# Altium PCB PCB_GEVE.PcbDoc
Units mm, origin at the board's own origin, x right, y up, seen from the top; angles counter-clockwise.
Board outline 138 x 140 mm, 4 copper layers (Component Side, GND, Alimentation, Solder Side), stack 0.844 mm thick; 88 components, 62 nets, 258 pads, 25 vias.
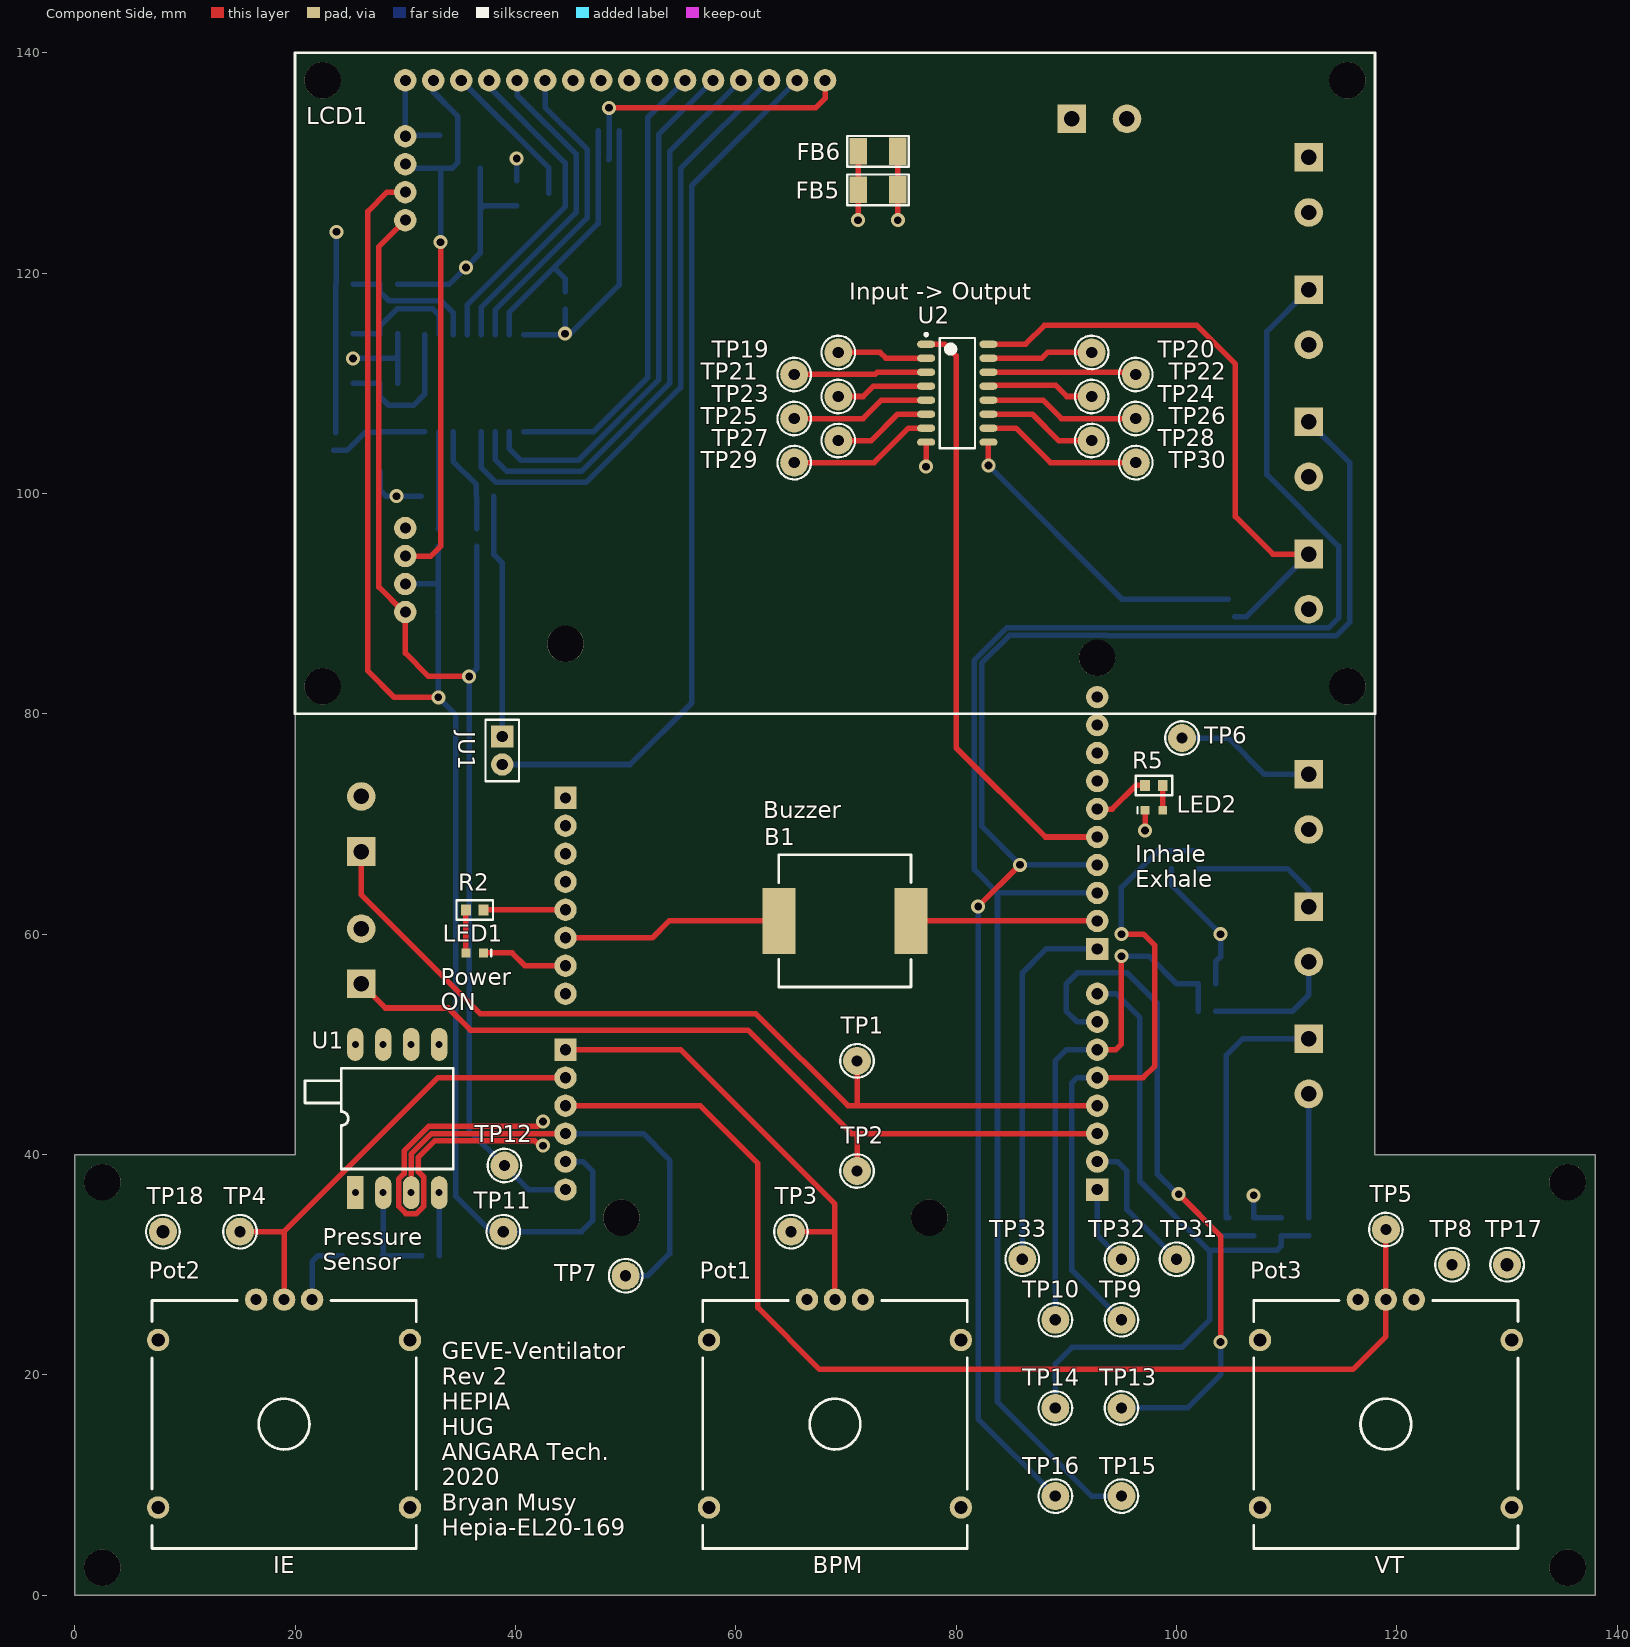
[diagram p0: Component Side view]
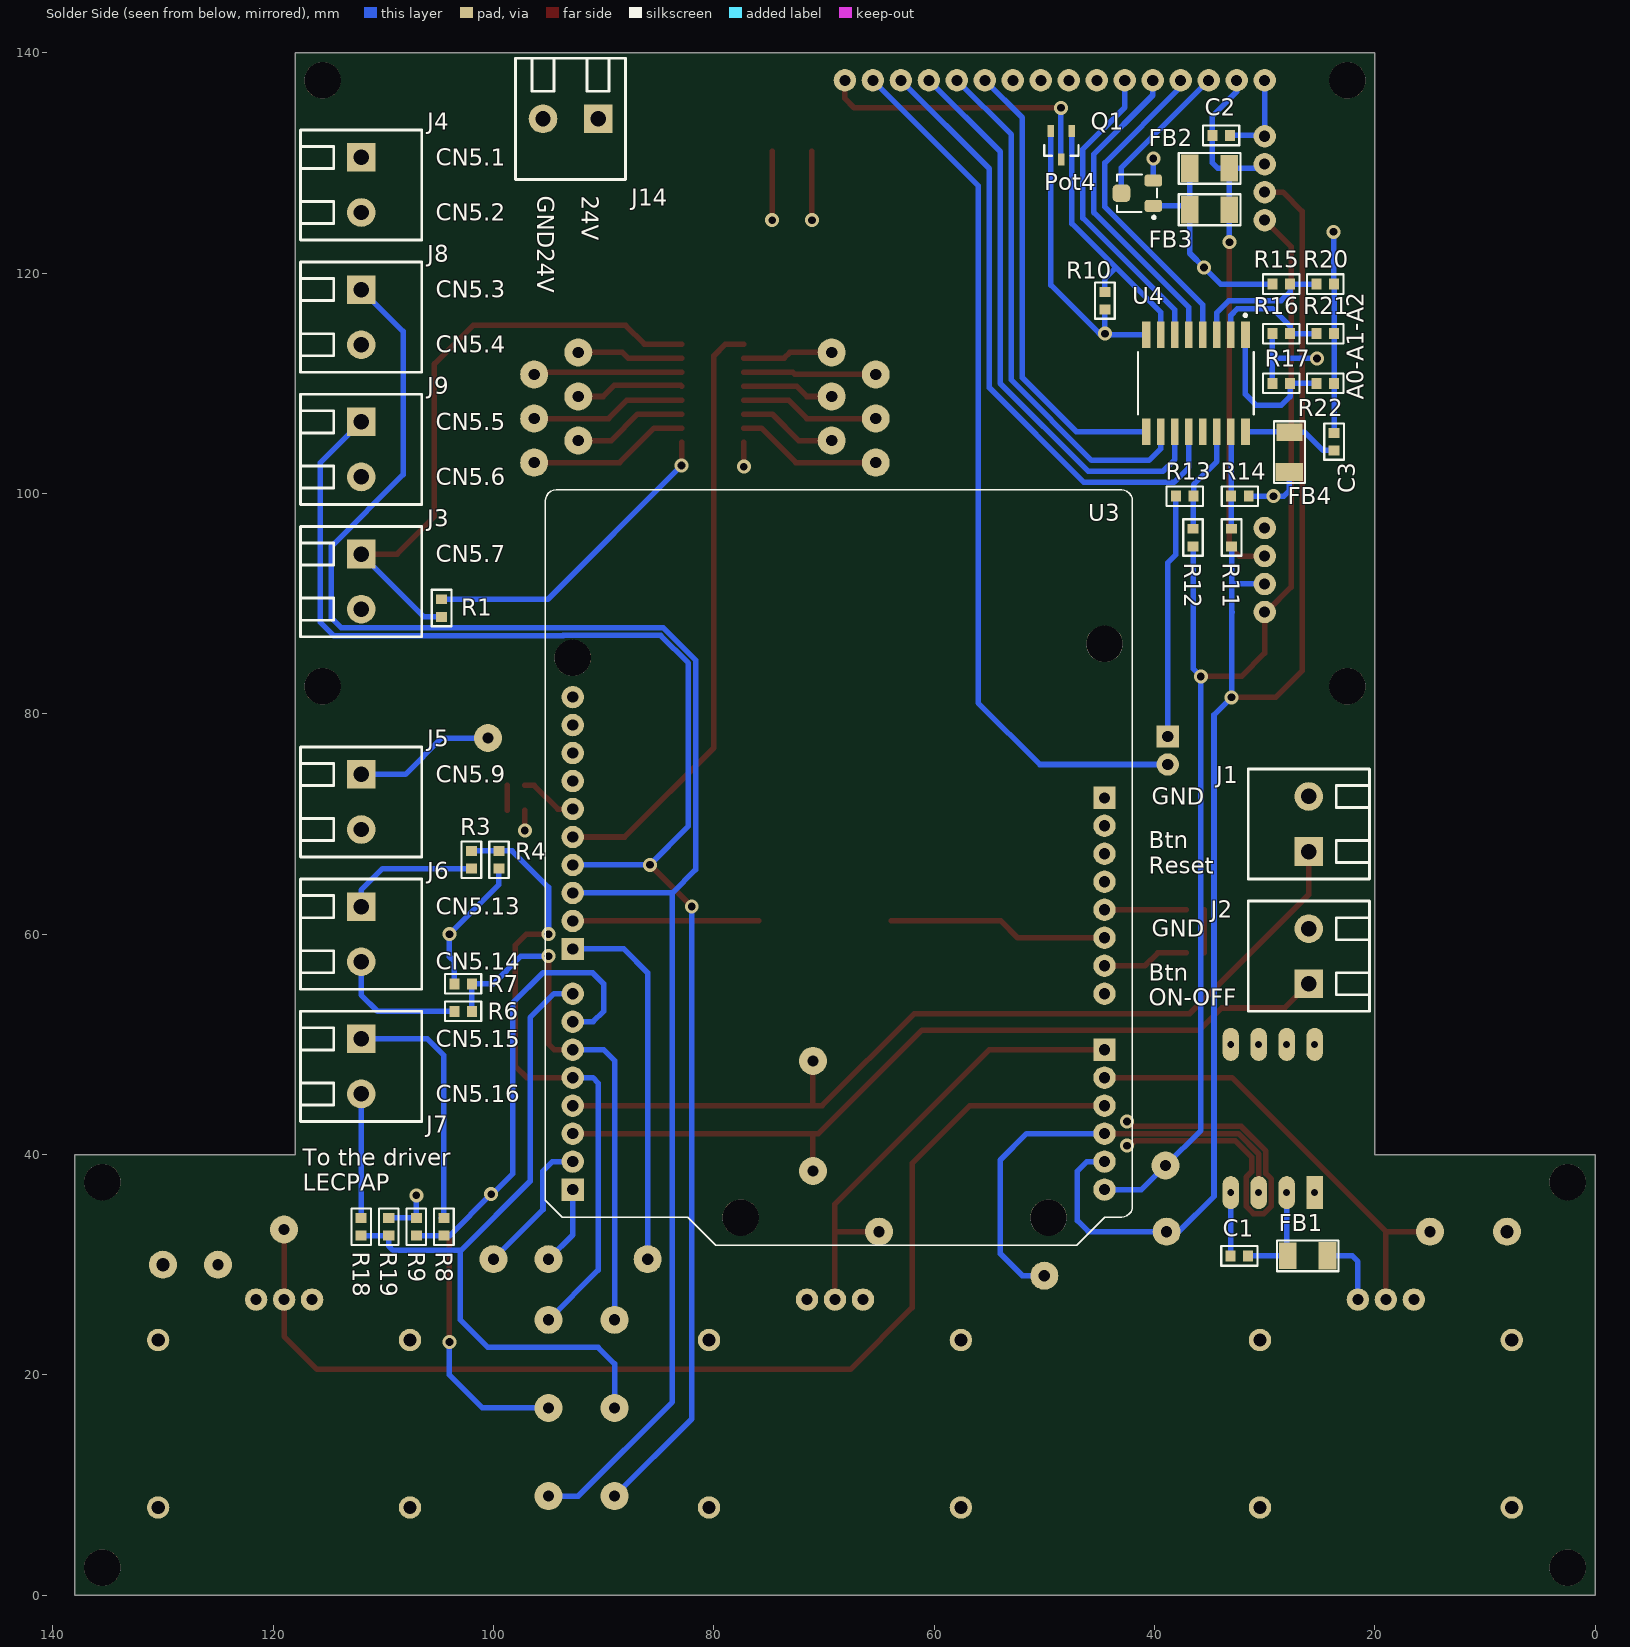
[diagram p1: Solder Side view, seen from below]
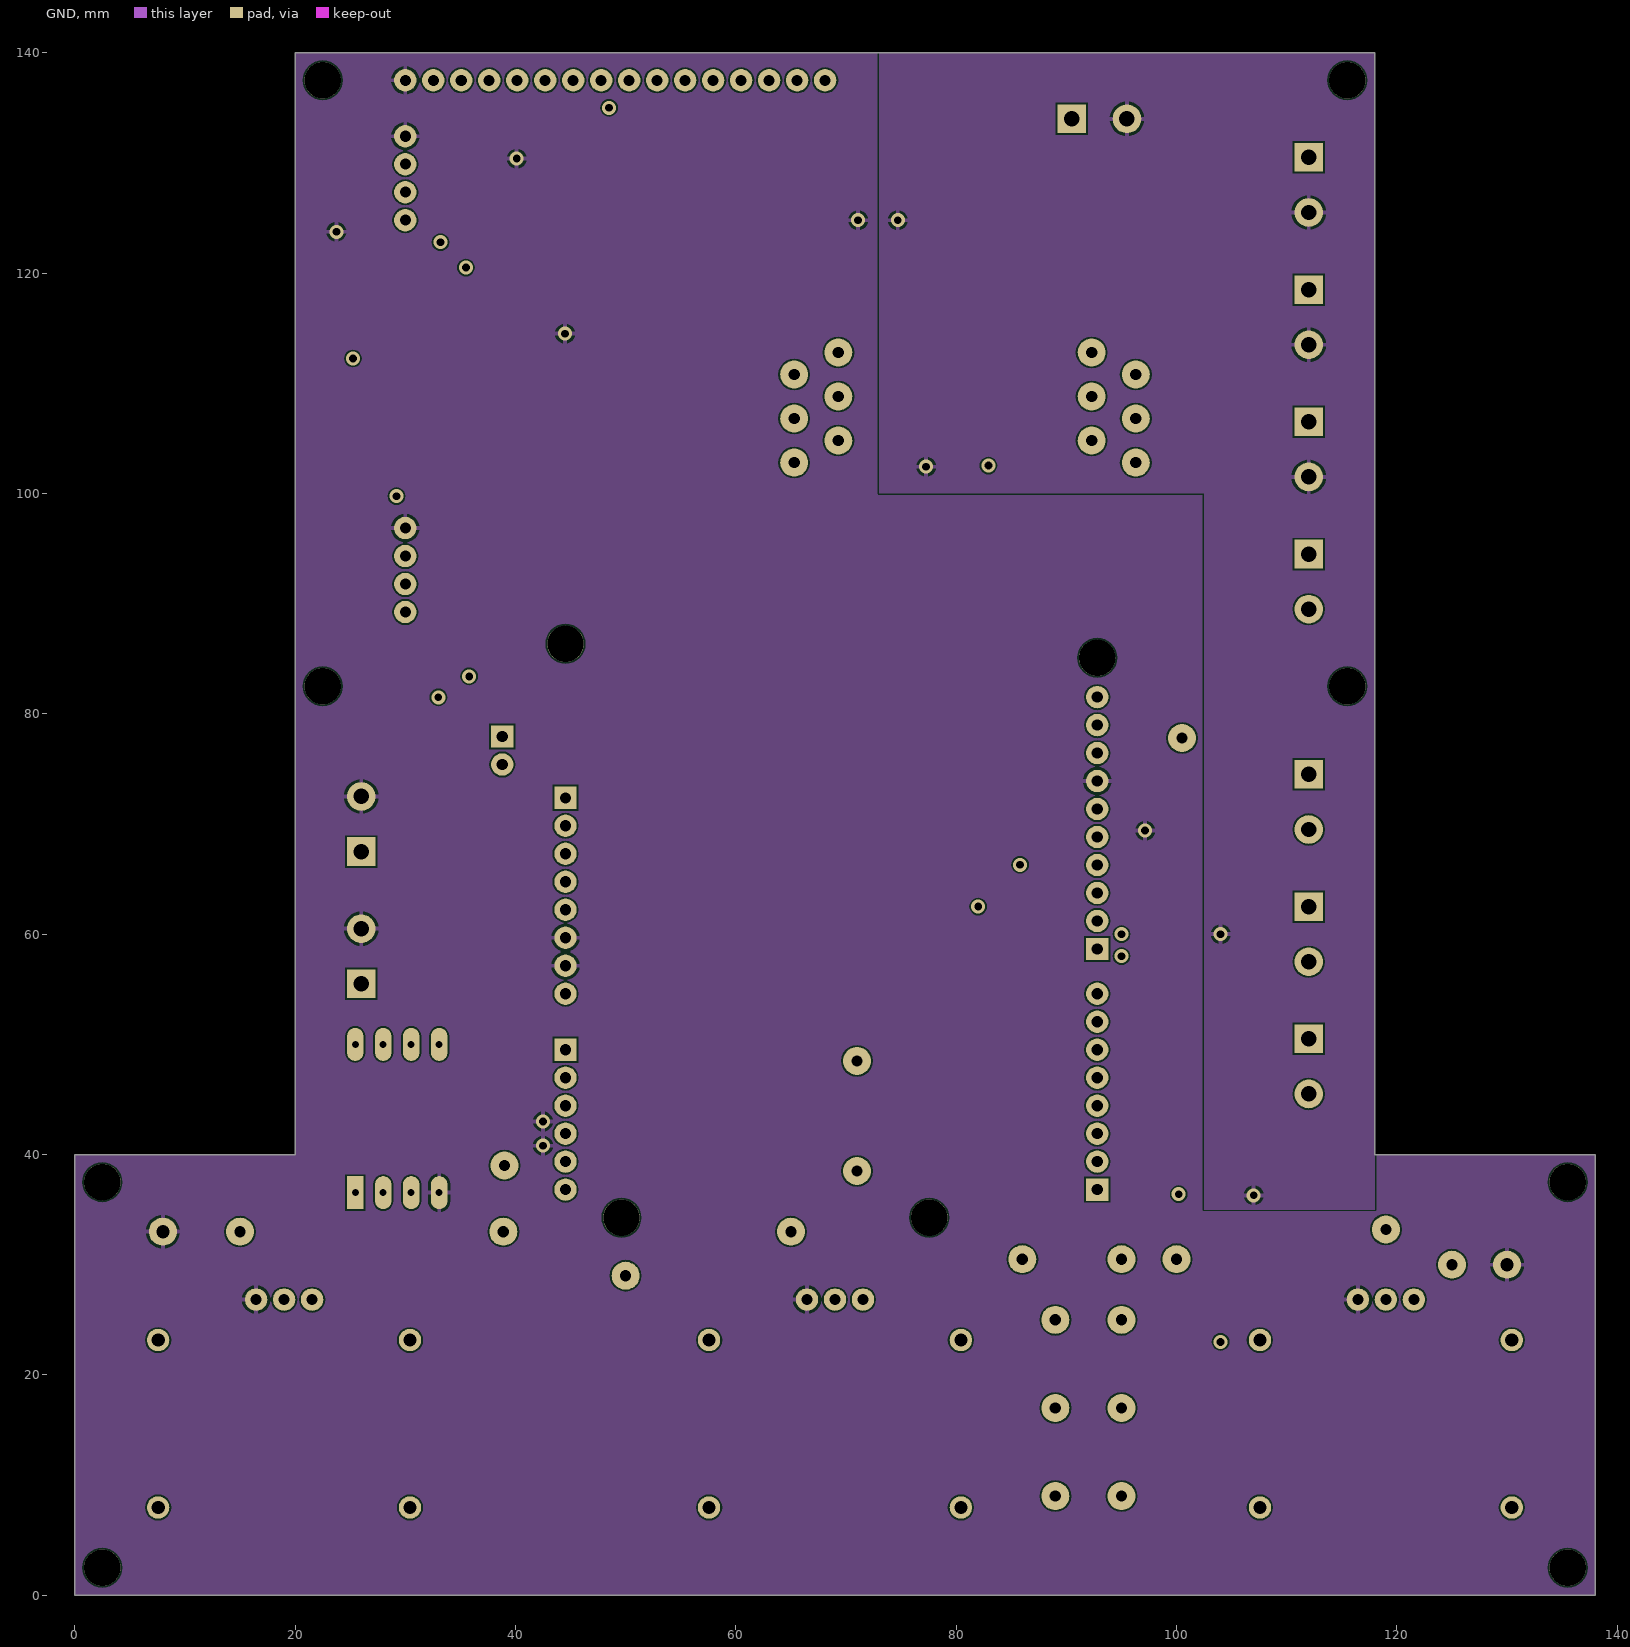
[diagram p2: GND]
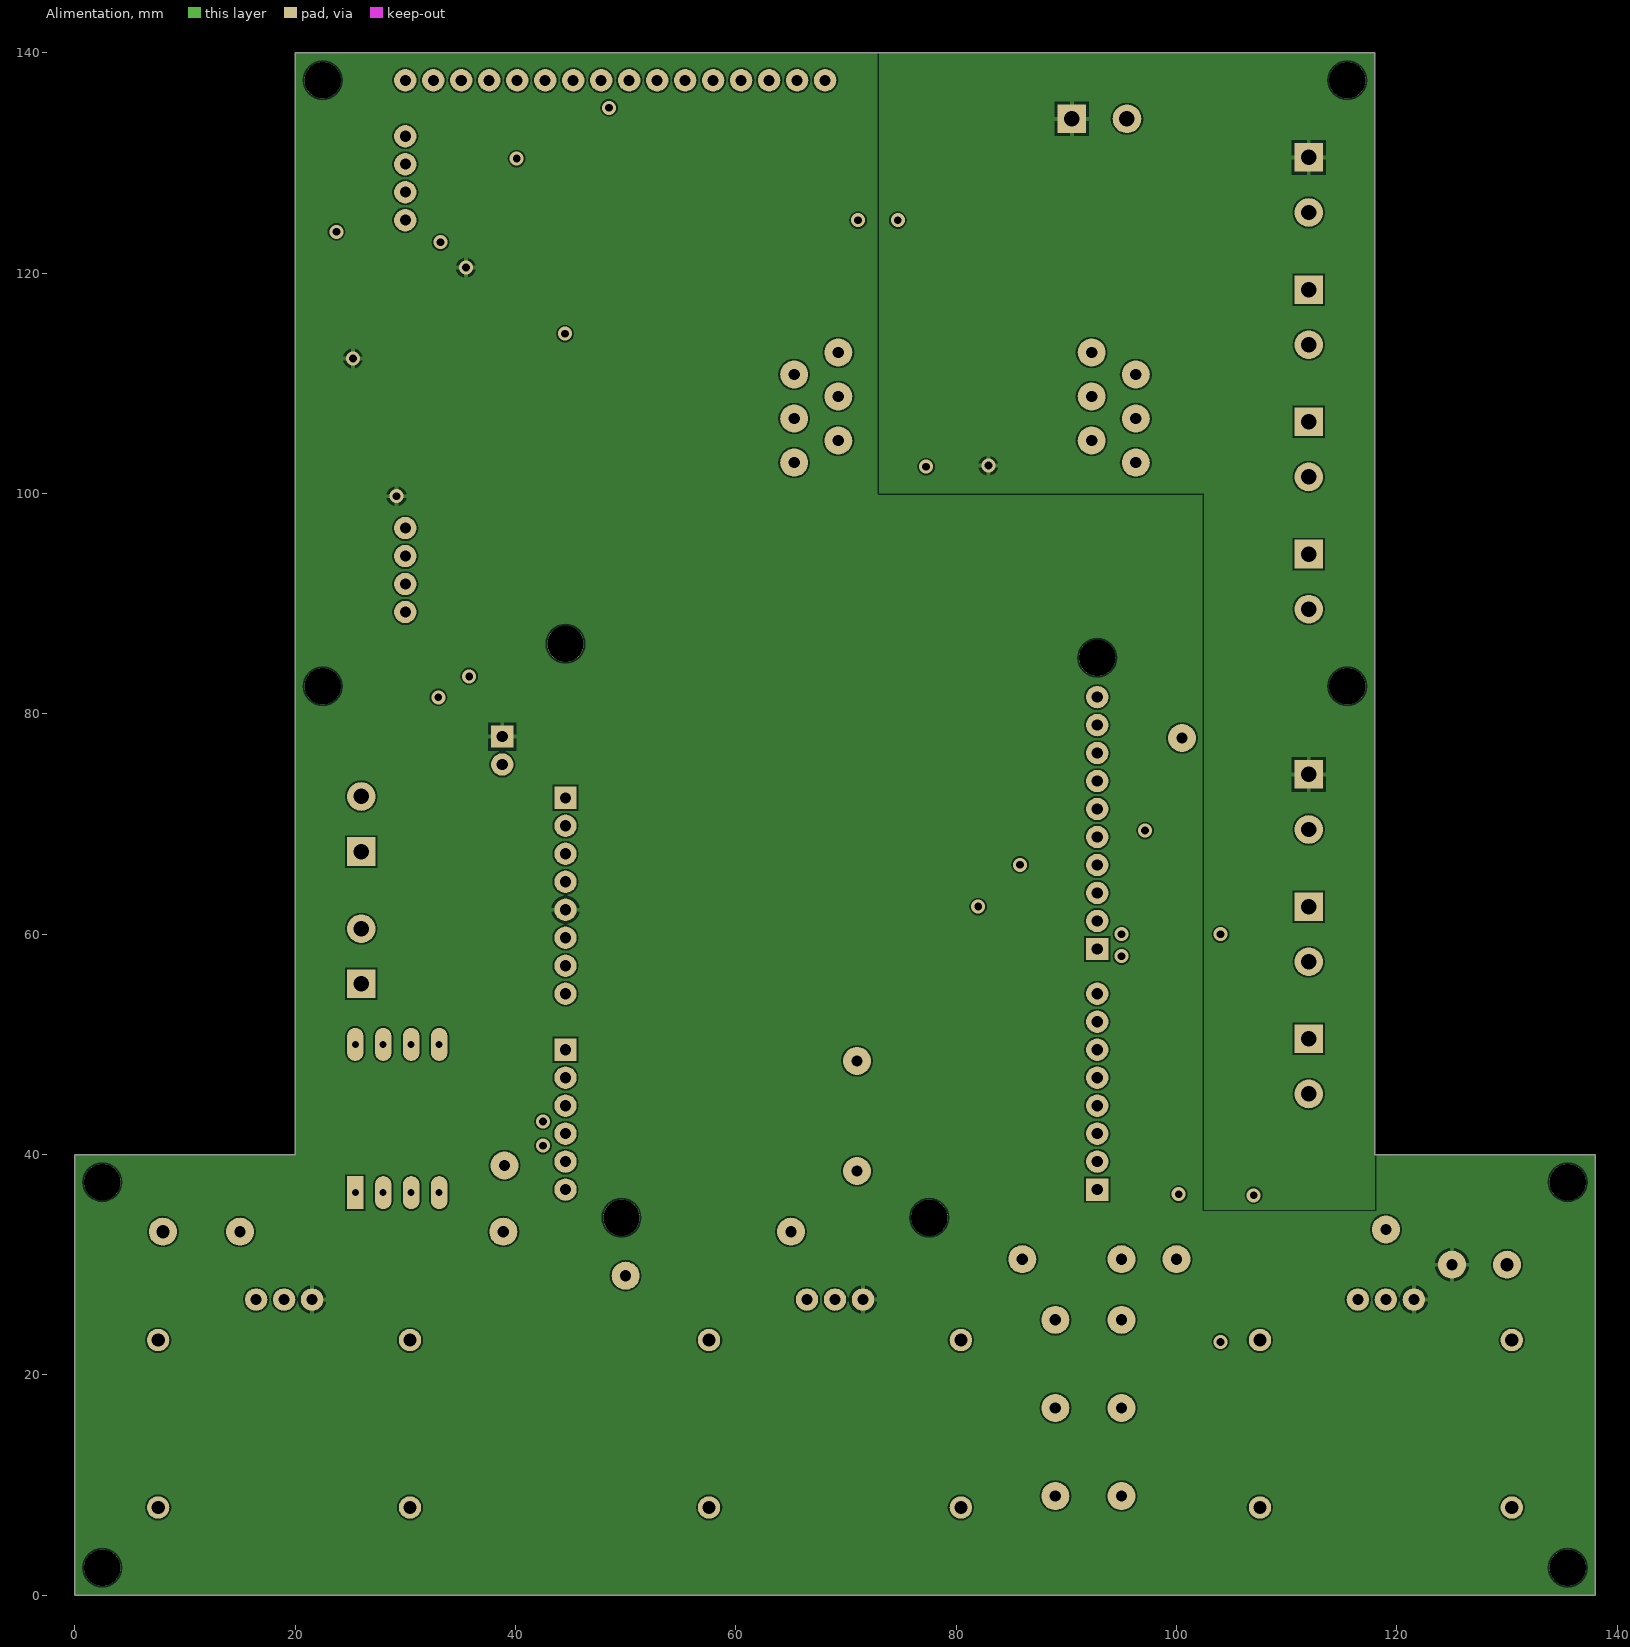
[diagram p3: Alimentation]

## Layer stack, top to bottom
Top Solder: solder mask 0.0102, Solder Resist, Dk 3.5
Component Side: signal copper 0.0356
Dielectric 1: core 0.32, FR-4, Dk 4.8
GND: signal copper 0.036
Dielectric 3: core 0.254, Dk 4.2
Alimentation: signal copper 0.036
Dielectric 4: prepreg 0.127, Dk 4.2
Solder Side: signal copper 0.0356
Bottom Solder: solder mask 0.0102, Solder Resist, Dk 3.5

## Board outline
20,140 118,140 118,40 138,40 138,0 0,0 0,1 0,40 20,40

## Design rules (kind name [scope] priority, off if disabled: settings)
Clearance Clearance-xPP-xTP-xTT [All] p1: gap=0.15 ignorepadtopadclearanceinfootprint=FALSE except(0: Arc-Hole Track-Hole SMDPad-Hole THPad-Hole Via-Hole Fill-Hole Poly-Hole Region-Hole Text-Hole)
ComponentClearance [All] p1: gap=0.25 collisioncheckmode=3 verticalgap=0.25 showdistances=FALSE
DiffPairsRouting [All] p1: maxlimit=0.25 minlimit=0.25 mostfreqgap=0.25 toplayer_minwidth=0.381 toplayer_maxwidth=0.381 toplayer_prefwidth=0.381 midlayer1_minwidth=0.381 midlayer1_maxwidth=0.381 midlayer1_prefwidth=0.381 midlayer2_minwidth=0.381 midlayer2_maxwidth=0.381 midlayer2_prefwidth=0.381 bottomlayer_minwidth=0.381 bottomlayer_maxwidth=0.381 bottomlayer_prefwidth=0.381 maxuncoupledlength=12.5
Height [All] p1: minheight=0 maxheight=25 prefheight=12.5
HoleSize HoleSize-PTH [All] p1: absolutevalues=TRUE maxlimit=2 minlimit=0.25 maxpercent=80.000 minpercent=20.000
HoleToHoleClearance [All] p1: gap=0.15 allowstackedmicrovias=TRUE
MinimumAnnularRing "Minimum IAR  >0.45mm" [((ObjectKind = 'Pad') OR (ObjectKind = 'Via')) And (Layer = 'MultiLayer') And (HoleDiameter > AsMM(0.45))] p1: minimumring=0.25 // minimum inner annular ring for pads > 0.45mm finished hole size
MinimumAnnularRing "Minimum IAR <=0.45mm" [((ObjectKind = 'Pad') OR (ObjectKind = 'Via')) And (Layer = 'MultiLayer') And (HoleDiameter <= AsMM(0.45))] p2: minimumring=0.225 // minimum inner annular ring for pads <= 0.45mm finished hole size
MinimumSolderMaskSliver [All] p1: minsoldermaskwidth=0.1
PlaneClearance PlaneClearance-IPI [All] p1: clearance=0.4
PlaneConnect [All] p1: planeconnectstyle=Relief reliefexpansion=0.4 reliefentries=4 reliefconductorwidth=0.4 reliefairgap=0.2
PolygonConnect PolygonConnect-xTW [All] p1: connectstyle=Relief reliefconductorwidth=0.4 reliefentries=4 polygonreliefangle="90 Angle" airgapwidth=0.254
RoomDefinition Composants_Supplementaire [InComponentClass('Composants_Supplementaire')] p1: confinementstyle=ConfineIn formatcopy=TRUE lockcomponents=FALSE outline -201,-299.5 -150.2,-299.5 -150.2,-274.1 -201,-274.1
RoutingCorners [All] p1: cornerstyle=45-Degree minsetback=2.5 maxsetback=2.5
RoutingVias "RoutingVias > 0.45mm" [(ObjectKind = 'Via') And (HoleDiameter > AsMM(0.45))] p1: holewidth=0.5 width=1 viastyle="Through Hole" minholewidth=0.45 minwidth=0.95 maxholewidth=0.9 maxwidth=1.4 // finishet hole size > 0.45mm
RoutingVias "RoutingVias <= 0.45mm" [(ObjectKind = 'Via') And (HoleDiameter <= AsMM(0.45))] p2: holewidth=0.3 width=0.8 viastyle="Through Hole" minholewidth=0.25 minwidth=0.7 maxholewidth=0.5 maxwidth=1 // finishet hole size <= 0.45mm
SilkToSilkClearance [All] p1: silktosilkclearance=0.2
SilkToSolderMaskClearance SilkscreenOverComponentPads [IsPad] p1: minsilkscreentomaskgap=0.2 clearancetoexposedcopper=TRUE
SolderMaskExpansion [All] p1: expansion=0.1
Width Width-xTW [All] p1: maxlimit=1.5 minlimit=0.15 preferedwidth=0.5
19 further rules are at their usual default settings.

## Classes and differential pairs
component class Composants_Supplementaire: Btn1 Btn2 J10 J11 J12

## Components (designator, comment, footprint, x,y, rotation, side; value= is the part's Value field where it differs from the comment)
B1 "CMT-1203-SMT-TR" CMT-1203-SMT-TR 69.9,61.2 r0 top
C1 "1uF" CAP_0603H0.8 32.3,30.8 r0 bottom
C2 "1uF" CAP_0603H0.8 33.95,132.5 r180 bottom
C3 "1uF" CAP_0603H0.8 23.7,104.7 r90 bottom
FB1 "BLM31AJ601SN1L" FERRITE_1206_1.1 26.1,30.8 r0 bottom value=0
FB2 "BLM31AJ601SN1L" FERRITE_1206_1.1 35,129.5 r180 bottom value=0
FB3 "BLM31AJ601SN1L" FERRITE_1206_1.1 35,125.75 r180 bottom value=0
FB4 "BLM31AJ601SN1L" FERRITE_1206_1.1 27.75,103.75 r90 bottom value=0
FB5 "BLM31AJ601SN1L" FERRITE_1206_1.1 72.9,127.554 r180 top value=0
FB6 "BLM31AJ601SN1L" FERRITE_1206_1.1 72.9,131.054 r180 top value=0
J1 "AST0250204" AST0250204 26,70 r90 bottom
J2 "AST0250204" AST0250204 26,58 r90 bottom
J3 "AST0250204" AST0250204 112,92 r270 bottom
J4 "AST0250204" AST0250204 112,128 r270 bottom
J5 "AST0250204" AST0250204 112,72 r270 bottom
J6 "AST0250204" AST0250204 112,60 r270 bottom
J7 "AST0250204" AST0250204 112,48 r270 bottom
J8 "AST0250204" AST0250204 112,116 r270 bottom
J9 "AST0250204" AST0250204 112,104 r270 bottom
J14 "AST0250204" AST0250204 93,134 r0 bottom
JU1 "PREC002SAAN-RC" Jumper_2P_P2.54 38.8,77.94 r270 top
LCD1 "LCD2004A" LCD2004 69,110 r0 top locked
LED1 "SM0603HCL" LED_0603-12 36.3,58.3 r0 top
LED2 "SM0603HCL" LED_0603-12 97.95,71.25 r180 top
Pot1 "10K" PCW1J-B28-BAB103L 69,15.5 r180 top
Pot2 "10K" PCW1J-B28-BAB103L 19,15.5 r180 top
Pot3 "10K" PCW1J-B28-BAB103L 119,15.5 r180 top
Pot4 "10k" Trimpot-3313-J1 41.55,127.25 r90 bottom
Q1 "BC817-25,215" SOT23-3 48.45,131.6 r270 bottom
R1 "5k6" RES_0603 104.7,89.6 r90 bottom
R2 "3k3" RES_0603 36.3,62.2 r180 top
R3 "22k" RES_0603 102,66.75 r90 bottom
R4 "5k6" RES_0603 99.5,66.75 r270 bottom
R5 "3k3" RES_0603 97.95,73.5 r0 top
R6 "22k" RES_0603 102.75,53 r180 bottom
R7 "5k6" RES_0603 102.75,55.5 r0 bottom
R8 "22k" RES_0603 104.5,33.45 r270 bottom
R9 "5k6" RES_0603 107,33.45 r90 bottom
R10 "4k7" RES_0603 44.5,117.5 r90 bottom
R11 "0R" RES_0603 33,96 r90 bottom
R12 "0R" RES_0603 36.5,96 r90 bottom
R13 "4k7" RES_0603 37.25,99.75 r180 bottom
R14 "4k7" RES_0603 32.25,99.75 r0 bottom
R15 "10k" RES_0603 28.5,119 r180 bottom
R16 "10k" RES_0603 28.5,114.5 r180 bottom
R17 "10k" RES_0603 28.5,110 r180 bottom
R18 "22k" RES_0603 112,33.45 r270 bottom
R19 "5k6" RES_0603 109.5,33.45 r90 bottom
R20 "0R" RES_0603 24.5,119 r180 bottom
R21 "0R" RES_0603 24.5,114.5 r180 bottom
R22 "0R" RES_0603 24.5,110 r180 bottom
TP1 "TP_HOOK" TP_HOOK 71,48.5 r0 top
TP2 "TP_HOOK" TP_HOOK 71,38.5 r0 top
TP3 "TP_HOOK" TP_HOOK 65,33 r0 top
TP4 "TP_HOOK" TP_HOOK 15,33 r0 top
TP5 "TP_HOOK" TP_HOOK 119,33.2 r0 top
TP6 "TP_HOOK" TP_HOOK 100.5,77.8 r0 top
TP7 "TP_HOOK" TP_HOOK 50,29 r0 top
TP8 "TP_HOOK" TP_HOOK 125,30 r0 top
TP9 "TP_HOOK" TP_HOOK 95,25 r0 top
TP10 "TP_HOOK" TP_HOOK 89,25 r0 top
TP11 "TP_HOOK" TP_HOOK 38.9,33 r0 top
TP12 "TP_HOOK" TP_HOOK 39,39 r0 top
TP13 "TP_HOOK" TP_HOOK 95,17 r0 top
TP14 "TP_HOOK" TP_HOOK 89,17 r0 top
TP15 "TP_HOOK" TP_HOOK 95,9 r0 top
TP16 "TP_HOOK" TP_HOOK 89,9 r0 top
TP17 "TP_PLATE" TP_PLATE 130,30 r0 top
TP18 "TP_PLATE" TP_PLATE 8,33 r0 top
TP19 "TP_HOOK" TP_HOOK 69.3,112.8 r0 top
TP20 "TP_HOOK" TP_HOOK 92.3,112.8 r0 top
TP21 "TP_HOOK" TP_HOOK 65.3,110.8 r0 top
TP22 "TP_HOOK" TP_HOOK 96.3,110.8 r0 top
TP23 "TP_HOOK" TP_HOOK 69.3,108.8 r0 top
TP24 "TP_HOOK" TP_HOOK 92.3,108.8 r0 top
TP25 "TP_HOOK" TP_HOOK 65.3,106.8 r0 top
TP26 "TP_HOOK" TP_HOOK 96.3,106.8 r0 top
TP27 "TP_HOOK" TP_HOOK 69.3,104.8 r0 top
TP28 "TP_HOOK" TP_HOOK 92.3,104.8 r0 top
TP29 "TP_HOOK" TP_HOOK 65.3,102.8 r0 top
TP30 "TP_HOOK" TP_HOOK 96.3,102.8 r0 top
TP31 "TP_HOOK" TP_HOOK 100,30.5 r0 top
TP32 "TP_HOOK" TP_HOOK 95,30.5 r0 top
TP33 "TP_HOOK" TP_HOOK 86,30.5 r0 top
U1 "SSCDRNN160MDAA5" "DIP8 SSC Series" 25.46,36.538 r90 top
U2 "ULN2003ADR" D0016A_M 80.1,109.1 r0 top
U3 "ARDUINO_UNO_REV3" ARDUINO_A000066 41.999,31.781 r90 bottom
U4 "PCF8574T/3,518" FP-SOT162-1-MFG 36.25,110 r270 bottom

## Footprints (in the part's own frame and the unit in brackets; to place one, negate y for a bottom-side part, rotate by r counter-clockwise, add the part's x,y. Pads: shape width x height; smd on the part's side, far side on the other; paste and mask are expansions set on the pad)
ARDUINO_A000066 [mil]
  rect 80x80 hole 39.37: 1(1598.21,100.05)
  round 80 hole 40: 2(1498.21,100.05) 3(1398.21,100.05) 4(1298.21,100.05) 5(1198.21,100.05) 6(1098.21,100.05) 7(998.21,100.05) 8(898.21,100.05) 10(598.21,100.05) 11(498.21,100.05) 12(398.21,100.05) 13(298.21,100.05) 14(198.21,100.05) 16(298.21,2000.05) 17(398.21,2000.05) 18(498.21,2000.05) 19(598.21,2000.05) 20(698.21,2000.05) 21(798.21,2000.05) 22(898.21,2000.05) 24(1158.21,2000.05) 25(1258.21,2000.05) 26(1358.21,2000.05) 27(1458.21,2000.05) 28(1558.21,2000.05) 29(1658.21,2000.05) 30(1758.21,2000.05) 31(1858.21,2000.05) 32(1958.21,2000.05)
  rect 80x80 hole 40: 9(698.21,100.05) 15(198.21,2000.05) 23(1058.21,2000.05)
  round 129.92 hole 129.92 unplated: ""(98.21,300.05) ""(98.21,1400.05) ""(2098.21,2000.05) ""(2148.21,100.05)
  silkscreen extent 0,0 2698,2098, body extent 0,0 2943,2100, height 603
AST0250204 [mm] "Female Header, Pitch 5mm, 1 x 2 Position, Height 20.5mm"
  rect 2.6x2.6 hole 1.4: 1(-2.5,0)
  round 2.6 hole 1.4: 2(2.5,0)
  silkscreen extent -5,-5.5 5,5.5, body extent -5,-16.09 5,5.5, height 21.23
CAP_0603H0.8 [mm] "Chip Capacitor, Body 1.6x0.8mm, Height 0.8mm, IPC Medium Density"
  rect 0.9x1 smd: 1(-0.8,0) 2(0.8,0)
  silkscreen extent -1.65,-0.89 1.65,0.89, body extent -0.87,-0.48 0.88,0.47, height 0.8
CMT-1203-SMT-TR [mm] "Buzzer"
  rect 3x6 smd: 1(-6,0) 2(6,0)
  silkscreen extent -6,-6 6,6
D0016A_M [mm] "SOIC, 16-Leads, Body 10x4mm, Pitch 1.27mm, IPC Low Density"
  oval 1.65x0.65 smd: 1(-2.825,4.445) 2(-2.825,3.175) 3(-2.825,1.905) 4(-2.825,0.635) 5(-2.825,-0.635) 6(-2.825,-1.905) 7(-2.825,-3.175) 8(-2.825,-4.445) 9(2.825,-4.445) 10(2.825,-3.175) 11(2.825,-1.905) 12(2.825,-0.635) 13(2.825,0.635) 14(2.825,1.905) 15(2.825,3.175) 16(2.825,4.445)
  silkscreen extent -2.95,-5 1.6,5.44, body extent -3,-4.95 3,4.95, height 1.59
"DIP8 SSC Series" [mm]
  rect 3x1.5 hole 0.635: 1(0,0)
  oval 3x1.5 hole 0.635: 2(0,-2.54) 3(0,-5.08) 4(0,-7.62) 5(13.462,-7.62) 6(13.462,-5.08) 7(13.462,-2.54) 8(13.462,0)
  silkscreen extent 2.16,-8.89 11.3,4.57, body extent -0.17,-8.8 13.63,3.6, height 5.83
FERRITE_1206_1.1 [mm] "Chip Ferrite Bead, 2-Leads, Body 3.2x1.6mm, Height 1.1mm, 18um Land Pad Thickness, 3.5A Rated Current"
  rect 1.6x2.5 smd mask+0: 1(-1.8,0)
  rect 1.6x2.4 smd mask+0: 2(1.8,0)
  silkscreen extent -2.79,-1.4 2.79,1.4, body extent -1.6,-0.8 1.6,0.8, height 1.1
FP-SOT162-1-MFG [mm]
  rect 2.4x0.8 smd paste+0 mask+0: 1(-4.4,4.495) 8(-4.4,-4.495) 9(4.4,-4.495) 16(4.4,4.495)
  rect 2.4x0.7 smd paste+0 mask+0: 2(-4.4,3.175) 3(-4.4,1.905) 4(-4.4,0.635) 5(-4.4,-0.635) 6(-4.4,-1.905) 7(-4.4,-3.175) 10(4.4,-3.175) 11(4.4,-1.905) 12(4.4,-0.635) 13(4.4,0.635) 14(4.4,1.905) 15(4.4,3.175)
  silkscreen extent -6.29,-5.25 2.83,5.25, body extent -5.15,-5.15 5.15,5.15, height 2.65
Jumper_2P_P2.54 [mil] "Pin Header 100mil spacing"
  rect 80x80 hole 40: 1(0,0)
  round 80 hole 40: 2(100,0)
  silkscreen extent -60,-60 160,60, body extent -50,-50 150,50, height 333
LCD2004 [mm]
  round 2.032 hole 1: 1(-39,-13.14) 1(-39,22.42) 2(-39,-15.68) 2(-39,19.88) 3(-39,-18.22) 3(-39,17.34) 4(-39,-20.76) 4(-39,14.8) 5(-39,27.5) 6(-36.46,27.5) 7(-33.92,27.5) 8(-31.38,27.5) 9(-28.84,27.5) 10(-26.3,27.5) 11(-23.76,27.5) 12(-21.22,27.5) 13(-18.68,27.5) 14(-16.14,27.5) 15(-13.6,27.5) 16(-11.06,27.5) 17(-8.52,27.5) 18(-5.98,27.5) 19(-3.44,27.5) 20(-0.9,27.5)
  round 3.3 hole 3.3 unplated: ""(-46.5,-27.5) ""(-46.5,27.5) ""(46.5,-27.5) ""(46.5,27.5)
  silkscreen extent -49,-30 49,30, body extent -49,-30 49,30.03, height 20.6
LED_0603-12 [mm] "Chip LED, 2-Leads, Body 1.6x0.8mm, IPC Medium Density"
  rect 0.8x0.8 smd: 1(-0.8,0) 2(0.8,0)
  silkscreen extent 1.5,-0.3 1.5,0.3, body extent -0.8,-0.4 0.8,0.4, height 0.7
PCW1J-B28-BAB103L [mm]
  round 2.032 hole 1: 1(-2.54,-11.335) 2(0,-11.335) 3(2.54,-11.335)
  round 2.032 hole 1.2: ""(-11.43,7.535) ""(-11.43,-7.665) ""(11.43,7.535) ""(11.43,-7.665)
  silkscreen extent -12,-11.25 12,11.25, body extent -11,-11 11,11, height 36
RES_0603 [mm] "Chip Resistor, Body 1.6x0.8mm, IPC Medium Density"
  rect 0.9x1 smd: 1(-0.8,0) 2(0.8,0)
  silkscreen extent -1.65,-0.89 1.65,0.89, body extent -0.85,-0.47 0.85,0.47, height 0.6
SOT23-3 [mm] "SOT23, 3-Leads, Body 2.9x1.5mm, Pitch 0.95mm, IPC Low Density"
  rect 1.1x0.6 smd: 1(-1.3,0.95) 2(-1.3,-0.95) 3(1.3,0)
  silkscreen extent 0,-1.55 0.95,1.55, body extent -1.4,-1.45 1.4,1.45, height 1.3
TP_HOOK [mil] "Miniature test point Hook"
  round 100 hole 40: 1(0,0)
  silkscreen extent -60,-60 60,60, body extent -50,-50 50,50, height 180
TP_PLATE [mm] "Miniature test point Plate (GND)"
  round 2.54 hole 1.2: 1(0,0)
  silkscreen extent -1.52,-1.52 1.52,1.52, body extent -1.27,-0.25 1.27,0.25, height 5.54
Trimpot-3313-J1 [mm] "TrimPot 3313, 3mm"
  rrect50% 1.1x1.6 smd: 1(-1.15,-1.45) 3(1.15,-1.44)
  rrect50% 1.6x1.6 smd: 2(0,1.45)
  silkscreen extent -2.32,-1.78 1.7,1.85, body extent -1.65,-1.78 1.65,1.73, height 2.1

## Part data
B1: Manufacturer="CUI Devices", Designer=B.Musy, HelpRUL=https://www.findchips.com/search/CMT-1203-SMT-TR, LastetRevisionDate=03.11.2020, ManufacturerPN=CMT-1203-SMT-TR, Supplier1=Digi-key, Supplier1PN=102-2197-1-ND
C1 C2 C3: library part D_CAP-64, "Boite Labo 0603: Ceramic Cap, 1uF, 10%, 50V, CAP_0603H0.8", DCVoltage (V)=50V, Manufacturer=Murata, ManufacturerPN=GRM188R61H105KAALD, Designer=R.Mastrocola, Footprint Category=SM_CHIP, HelpURL=http://www.findchips.com/search/GRM188R61H105KAALD, LatestRevisionDate=19.02.2015, Part Number=D_CAP-64, Pol=NO, Projet=Labo, Supplier1=Mouser, Supplier1PN=81-GRM188R61H105KALD, Supplier2=Digi-Key, Supplier2PN=1276-1860-1-ND, Tol (%)=10, Type=Ceramic, UnitaryCost=0
FB1 FB2 FB3 FB4 FB5 FB6: library part D_IND-1, "Chip Ferrite Bead, 1206, 200mA, DCRes=0.90ohm, 100MHz_Res=600ohm", Manufacturer=Murata, DCRes (mOhm)=0.9, Designer=FG, Footprint Category=SM_CHIP, HelpURL=http://www.findchips.com/search/BLM31AJ601SN1L, Imax(A)=200mA, LatestRevisionDate=25.02.2015, ManufacturerPN=BLM31AJ601SN1L, Part Number=D_IND-1, Projet=Labo, Supplier1=Mouser, Supplier1PN=81-BLM31A601S, Supplier2=-, Supplier2PN=-, Tol (%)=25, UnitaryCost=0.325
J1 J2 J3 J4 J5 J6 J7 J8 J9: Manufacturer="METZ Connect USA", Designer=B.Musy, HelpURL=https://www.findchips.com/search/AST0250204, LastestRevision=05.11.2020, ManufacturerPN=AST0250204, Supplier1=Digikey, Supplier1PN=1849-1111-ND, UnitaryCost=1.5
J14: "Connecteur a levier", Manufacturer="METZ Connect USA", Designer=B.Musy, HelpURL=https://www.findchips.com/search/AST0250204, LastestRevision=05.11.2020, ManufacturerPN=AST0250204, Supplier1=Digikey, Supplier1PN=1849-1111-ND, UnitaryCost=1.5
JU1: library part M_EME-2, "CONN HEADER .100\" SNGL STR 2POS", Manufacturer="Sullins Connector Solutions", Designer=R.Mastrocola, Footprint Category=M_Electromechanic, HelpURL=http://www.findchips.com/search/PREC002SAAN-RC, LatestRevisionDate=03.03.2015, ManufacturerPN=PREC002SAAN-RC, Part Number=M_EME-2, Projet=Labo, Supplier1=Digi-Key, Supplier1PN=S1012EC-02-ND, Supplier2=-, Supplier2PN=-, UnitaryCost=0.12
LCD1: Manufacturer=Geekcreit, ManufacturerPN=LCP, Designer=B.Musy, LastestRevision=05.11.2020, Supplier1=Banggood, Supplier1Link=https://www.banggood.com/Geekcreit-IIC-I2C-2004-204-20-x-4-Character-LCD-Display-Screen-Module-Blue-Geekcreit-for-Arduino-products-that-work-with-official-Arduino-boards-p-908616.html?akmClientCountry=CH&utm_design=41&utm_source=emarsys&utm_medium=Neworder171109&utm_campaign=trigger-order&utm_content=winna&sc_src=email_2675773&sc_eh=e67184d980d793a21&sc_llid=15736518&sc_lid=105229698&sc_uid=BLRGE8BQiu&cur_warehouse=UK
LED1 LED2: library part D_OPT-2, "LED red smd 0603 2 mA", Manufacturer=Bivar, Designer=FG, Footprint Category=SM_CHIP, HelpURL=http://www.findchips.com/search/SM0603HCL, LatestRevisionDate=18.01.2016, ManufacturerPN=SM0603HCL, Part Number=D_OPT-2, Projet=PoliHVGen, Supplier1=Mouser, Supplier1PN=749-SM0603HCL, Supplier2=Digi-Key, Supplier2PN=492-2524-1-ND, UnitaryCost=0.35
Pot1 Pot2 Pot3: library part POT10K, Manufacturer=Bourns.inc, ManufacturerPN=PCW1J-B28-BAB103L, Designer=B.Musy, HelpURL=https://www.findchips.com/search/PCW1J-B28-BAB103L, LastestRevisionDate=05.11.2020, Supplier1=Digikey, Supplier1PN=PCW1J-B28-BAB103L-ND
Pot4: library part D_RES-331, "TrimPot SMD 1 Tour 10k 3mm", Manufacturer=Bourns, ManufacturerPN=3313J-1-103E, Pwr Rating (W)=0.125, Designer=JCO, Footprint Category=SM_MISC, HelpURL=http://www.findchips.com/search/3313J-1-103E, LatestRevisionDate=23.04.2018, Part Number=D_RES-331, Projet=Labo, Supplier1=Mouser, Supplier1PN=652-3313J-1-103E, Supplier2=Digi-Key, Supplier2PN=3313J-103ECT-ND, Tcoef (PPM/°C)=100, Tol (%)=20, UnitaryCost=2.01
Q1: library part D_TRS-9, "Bipolar NPN, General Purpose, 45V,100MHz, 500mA", Manufacturer="NXP Semi", Designer=R.Mastrocola, Footprint Category=SM_SOT, HelpURL=http://www.findchips.com/search/BC817-25,215, LatestRevisionDate=12.04.2016, ManufacturerPN=BC817-25,215, Part Number=D_TRS-9, Projet=PTR, Supplier1=Mouser, Supplier1PN=771-BC817-25-T/R, Supplier2=Digi-Key, Supplier2PN=568-1630-1-ND, Type=Bip-NPN, UnitaryCost=0.13
R1 R4 R7 R9 R19: library part D_RES-92, "Thin Film Resistor, Boite Labo 0603, 5k6 1%", Manufacturer=Vishay, ManufacturerPN=MCT06030C5601FP500, Pwr Rating (W)=0.1, Designer=R.Mastrocola, Footprint Category=SM_CHIP, HelpURL=http://www.findchips.com/search/MCT06030C5601FP500, LatestRevisionDate=16.02.2015, Part Number=D_RES-92, Projet=Labo, Supplier1=Mouser, Supplier1PN=594-MCT06030C5601FP5, Supplier2=-, Supplier2PN=-, Tcoef (PPM/°C)=18, Tol (%)=1, UnitaryCost=0.057
R2 R5: library part D_RES-86, "Thin Film Resistor, Boite Labo 0603, 3k3 1%", Manufacturer=Vishay, ManufacturerPN=MCT06030C3301FP500, Pwr Rating (W)=0.1, Designer=R.Mastrocola, Footprint Category=SM_CHIP, HelpURL=http://www.findchips.com/search/MCT06030C3301FP500, LatestRevisionDate=16.02.2015, Part Number=D_RES-86, Projet=Labo, Supplier1=Mouser, Supplier1PN=594-MCT06030C3301FP5, Supplier2=-, Supplier2PN=-, Tcoef (PPM/°C)=18, Tol (%)=1, UnitaryCost=0.057
R3 R6 R8 R18: library part D_RES-106, "Thin Film Resistor, Boite Labo 0603, 22k 1%", Manufacturer=Vishay, ManufacturerPN=MCT06030C2202FP500, Pwr Rating (W)=0.1, Designer=R.Mastrocola, Footprint Category=SM_CHIP, HelpURL=http://www.findchips.com/search/MCT06030C2202FP500, LatestRevisionDate=16.02.2015, Part Number=D_RES-106, Projet=Labo, Supplier1=Mouser, Supplier1PN=594-MCT06030C2202FP5, Supplier2=-, Supplier2PN=-, Tcoef (PPM/°C)=18, Tol (%)=1, UnitaryCost=0.057
R10 R13 R14: library part D_RES-90, "Thin Film Resistor, Boite Labo 0603, 4k7 1%", Manufacturer=Vishay, ManufacturerPN=MCT06030C4701FP500, Pwr Rating (W)=0.1, Designer=R.Mastrocola, Footprint Category=SM_CHIP, HelpURL=http://www.findchips.com/search/MCT06030C4701FP500, LatestRevisionDate=16.02.2015, Part Number=D_RES-90, Projet=Labo, Supplier1=Mouser, Supplier1PN=594-MCT06030C4701FP5, Supplier2=-, Supplier2PN=-, Tcoef (PPM/°C)=18, Tol (%)=1, UnitaryCost=0.057
R11 R12 R20 R21 R22: library part D_RES-1, "Thin Film Resistor, Boite Labo 0603, Jumper 0R", Manufacturer=Vishay, ManufacturerPN=MCT06030Z0000ZP500, Pwr Rating (W)=0.1, Designer=R.Mastrocola, Footprint Category=SM_CHIP, HelpURL=http://www.findchips.com/search/MCT06030Z0000ZP500, LatestRevisionDate=16.02.2015, Part Number=D_RES-1, Projet=Labo, Supplier1=Mouser, Supplier1PN=594-MCT06030Z0000ZP5, Supplier2=-, Supplier2PN=-, Tcoef (PPM/°C)=18, Tol (%)=1, UnitaryCost=0.047
R15 R16 R17: library part D_RES-98, "Thin Film Resistor, Boite Labo 0603, 10k 1%", Manufacturer=Vishay, ManufacturerPN=MCT06030C1002FP500, Pwr Rating (W)=0.1, Designer=R.Mastrocola, F26=71-CRW060310K0KEAC, F27="Attention +/- 100ppm", Footprint Category=SM_CHIP, HelpURL=http://www.findchips.com/search/MCT06030C1002FP500, LatestRevisionDate=16.02.2015, Part Number=D_RES-98, Projet=Labo, Supplier1=Mouser, Supplier1PN=594-MCT06030C1002FP5, Supplier2=-, Supplier2PN=-, Tcoef (PPM/°C)=18, Tol (%)=1, UnitaryCost=0.057
TP1 TP2 TP3 TP4 TP5 TP6 TP7 TP8 TP9 TP10 TP11 TP12 TP13 TP14 TP15 TP16 TP19 TP20 TP21 TP22 TP23 TP24 TP25 TP26 TP27 TP28 TP29 TP30 TP31 TP32 TP33: library part M_TST-2, "Test Point Hook Type", Manufacturer="Keystone Electronics", ManufacturerPN=5001, Designer=R.Mastrocola, Footprint Category=TH_TESTPOINTS, HelpURL=http://www.findchips.com/search/5001, LatestRevisionDate=17.02.2015, Part Number=M_TST-2, Projet=Labo, Supplier1=Mouser, Supplier1PN=534-5001, Supplier2=-, Supplier2PN=-, UnitaryCost=0.352
TP17 TP18: library part M_TST-3, "Test Point Plate Type (for GND)", Manufacturer="Keystone Electronics", ManufacturerPN=1035, Designer=R.Mastrocola, Footprint Category=TH_TESTPOINTS, HelpURL=http://www.findchips.com/search/1035, LatestRevisionDate=17.02.2015, Part Number=M_TST-3, Projet=Labo, Supplier1=Mouser, Supplier1PN=534-1035, Supplier2=-, Supplier2PN=-, UnitaryCost=0.198
U1: Manufacturer="Honeywell Sensing and Productivity Solutions", Designer=B.Musy, HelpURL=https://www.findchips.com/search/SSCDRNN160MDAA5, LastestRevisionDate=03.11.2020, ManufacturerPN=SSCDRNN160MDAA5, Supplier1=Digi-Key, Supplier1PN=480-5448-ND, UnitaryCost=30.96
U2: library part CMP-2000-04953-1, "High-Voltage, High-Current Darlington Transistor Array, 0.5 A, 50 V, -20 to 70 degC, 16-Pin SOIC (D), Green (RoHS & no Sb/Br), Tape and Reel", Manufacturer=TexasInstruments, Maximum Collector Emitter Saturation Voltage=1.1@100mA, Maximum Collector Emitter Voltage=50V, Package=16SOIC, Package Description="16-Pin Plastic Small Outline, Body 9.9 x 3.9 mm, Pitch 1.27 mm", Package Reference=D16, Package Version="4040047-6/M, 06/2011", Peak DC Collector Current=0.5A, Category=DarlingtonBJT, Configuration=Array7, Datasheet URL=http://www.ti.com/general/docs/lit/getliterature.tsp?genericPartNumber=uln2003a&fileType=pdf, Datasheet Version="Rev. O, 01/2016", Manufacturer URL=http://www.ti.com/, Mounting=SurfaceMount, Package URL=http://www.ti.com/lit/ml/mpds178g/mpds178g.pdf, Packaging=Tape&Reel, Rad Hard=No, Type=NPN
U3: library part ARDUINOUNOREV3, Manufacturer=Arduino, ManufacturerPN=A000066, Designer=B.Musy, HelpURL=https://www.findchips.com/search/A000066, LastestRevisionDate=05.11.2020, Supplier1=Digikey, Supplier1PN=1050-1024-ND, UnitaryCost=20.20
U4: library part CMP-10112-000010-1, "IC I/O EXPANDER I2C 8B 16SOIC", Ambient Temperature Range High=+85°C, Ambient Temperature Range Low=-40°C, Frequency=100kHz, Manufacturer="NXP Semiconductors", Max Junction Temp=+125°C, Max Supply Voltage=6V, Min Supply Voltage=2.5V, Nominal Supply Current=40uA, Package=SOT162-1, Temperature="-40°C to +85°C", Automotive=No, Category=IC, ComponentLink2Description=Datasheet, ComponentLink2URL=https://www.nxp.com/docs/en/data-sheet/PCF8574_PCF8574A.pdf, Device Class L1="Integrated Circuits (ICs)", Device Class L2="Interface ICs", Device Class L3="I/O Expanders", Digikey Description="IC I/O EXPANDER I2C 8B 16SOIC", Footprint Url=https://www.nxp.com/docs/en/package-information/SOT162-1.pdf, Height=2.65mm, Interface=I2C, Ipc Land Pattern Name=SOIC127P1032X265-16, Lead Free=Yes, Manufacturer Part Number=PCF8574T/3,518, Mouser Description="PCF8574 Series 2.5 - 6V Remote 8-bit I/O Expander for I2C-bus - SOIC-16", Number Of I/Os=8, Octopart=https://octopart.com/pcf8574t%2F3%2C518-nxp+semiconductors-10470852, RoHS=TRUE, Standoff Height=0.1mm, Temperature Range High=+85°C, Temperature Range Low=-40°C

## Free pads (board coordinates)
  round 3.3 hole 3.3 unplated: ""(2.5,2.5) ""(2.5,37.5) ""(135.5,2.5) ""(135.5,37.5)

## Via types
v1: diameter 1.27, hole 0.711, Component Side to Solder Side, 25 vias

## Nets (pads, with @x,y where several pads share a name; then routed paths per layer and width w, separated by ;. In a path a pad name is that pad's centre, name@x,y a point inside that pad or via, vN(x,y) a via of type N, cw(c..) or ccw(c..) an arc to the next point about the centre after c; other vN are vias at no path point)
5V: FB1.1 FB2.1 FB3.1 FB4.1 JU1.1 Pot1.1 Pot2.1 Pot3.1 Pot4.1 R2.1 R13.1 R14.1 R15.1 R16.1 R17.1 TP8.1 U3.5 | length 70
  Component Side w0.5: R2.1 44.524,62.2 U3.5
  Solder Side w0.5: Pot2.1 21.54,30.29 22.05,30.8 FB1.1 ; v1(25.25,112.25) 29.3,112.25 ; FB4.1 27.75,100.25 28.25,99.75 v1(29.2,99.75) R14.1 ; R17.1 29.3,112.25 ; R16.1 29.3,112.25 ; R15.1 34,119 v1(35.5,120.5) 36.8,121.8 FB3.1 ; FB2.1 FB3.1 ; R13.1 38.05,94.45 38.8,93.7 JU1.1 ; Pot4.1 37.15,126.1 FB3.1
"5V LCD": C2.1 FB2.2 FB3.2 LCD1.2 LCD1.6 | length 51.6
  Component Side w0.5: LCD1.2@30,94.32 32.32,94.32 33.2,95.2 v1(33.2,122.8)
  Solder Side w0.5: LCD1.2@30.12,130 30,129.88 30.38,129.5 FB2.2 ; LCD1.6 32.54,136.46 34.75,134.25 C2.1 34.75,130 34.25,129.5 FB2.2 ; v1(33.2,122.8) FB3.2 FB2.2
24V: J4.1 J5.1 J14.1 R1.2 TP6.1 U2.9 | length 41.8
  Component Side w0.5: v1(82.925,102.525) U2.9
  Solder Side w0.5: v1(82.925,102.525) 95.05,90.4 R1.2 ; TP6.1 104.7,77.8 108,74.5 J5.1
"Btn Errors Reset": J1.1 TP1.1 U3.18 | length 82.7
  Component Side w0.5: J1.1 26,63.6 36.8,52.8 61.8,52.8 70.164,44.436 71,44.436 ; TP1.1 71,44.436 ; U3.18 71,44.436
"Btn On/Off": J2.1 TP2.1 U3.17 | length 75.8
  Component Side w0.5: J2.1 28.2,53.3 33.9,53.3 35.9,51.3 61.1,51.3 70.504,41.896 71,41.896 ; TP2.1 71,41.896 ; U3.17 71,41.896
BUSY: R6.2 R7.1 TP10.1 U3.20 | length 48.6
  Component Side w0.5: U3.20 94.5,49.516 95,50.016 v1(95,58)
  Solder Side w0.5: TP10.1 89,48.516 90,49.516 U3.20 ; v1(95,58) 97.5,58 100,55.5 R7.1 R6.2
CaptPression: TP7.1 U1.3 U3.12 | length 42.1
  Component Side w0.5: U1.3 30.54,40.04 32.396,41.896 U3.12
  Solder Side w0.5: U3.12 51.604,41.896 54,39.5 54,31 52,29 TP7.1
GND: B1.1 C1.2 C2.2 C3.2 FB5.2 FB6.2 J1.2 J2.2 LCD1.1 LCD1.5 LED1.2 LED2.2 Pot1.3 Pot2.3 Pot3.3 Pot4.3 Q1.2 R10.1 R20.2 R21.2 R22.2 TP17.1 TP18.1 U1.4 U3.6 U3.7 U3.29 U4.8 | length 136.1
  Component Side w0.5: LED1.2 39.7,58.3 40.864,57.136 U3.7 ; v1(42.5,40.8) 42.2,40.8 41.754,41.246 32.665,41.246 31.19,39.771 31.19,38.438 31.69,37.938 31.69,35.312 31.016,34.638 30.064,34.638 29.39,35.312 29.39,37.764 29.89,38.264 29.89,40.309 32.127,42.546 42.046,42.546 v1(42.5,43) ; U3.6 52.426,59.676 53.95,61.2 B1.1 ; v1(71.1,124.8) FB5.2 FB6.2 ; v1(97.15,69.4) LED2.2
  Solder Side w0.5: C3.2 R22.2 R21.2 R20.2 23.75,119.05 v1(23.75,123.75) ; LCD1.5 30,132.42 30.08,132.5 C2.2 ; U1.4 33.1,36.518 C1.2 ; Pot4.3 v1(40.11,130.39) ; U4.8 44.9,114.4 v1@44.8,114.5 ; R10.1 v1(44.5,114.5) v1@44.8,114.5 ; Q1.2 49.4,118.9 45,114.5 v1@44.8,114.5
GND24V: FB5.1 FB6.1 J4.2 J8.2 J9.2 J14.2 R4.2 R7.2 R9.2 R19.2 U2.8 | length 25.5
  Component Side w0.5: v1(74.7,124.8) FB5.1 FB6.1 ; v1(77.275,102.425) U2.8
  Solder Side w0.5: R4.2 99.5,64.5 v1(104,60) 104,57.95 103.55,57.5 R7.2 ; v1(107,36.3) R9.2 R19.2
INP: R18.2 R19.1 TP14.1 U3.22 | length 64.6
  Solder Side w0.5: TP14.1 89,21 90.5,22.5 100.5,22.5 103,25 103,31.3 ; U3.22 94.5,54.596 96.673,52.423 96.673,37.577 102.95,31.3 103,31.3 ; R18.2 R19.1 109.5,31.7 109.1,31.3 103,31.3
NetB1_2: B1.2 U3.24 | length 16.9
  Component Side w0.5: B1.2 U3.24
NetC1_1: C1.1 FB1.2 U1.2 | length 9.4
  Solder Side w0.5: U1.2 28,30.9 FB1.2 C1.1
NetC3_1: C3.1 FB4.2 U4.16 | length 9
  Solder Side w0.5: C3.1@23.5,103.9 C3.1 24.7,103.9 26.35,105.55 FB4.2 27.8,105.6 U4.16
NetJ3_1: J3.1 R1.1 U2.16 | length 55.6
  Component Side w0.5: U2.16 86.295,113.545 88,115.25 101.85,115.25 105.35,111.75 105.35,97.9 108.75,94.5 J3.1
  Solder Side w0.5: 105.3,88.8 106.3,88.8 J3.1
NetJ6_1: J6.1 R3.1 | length 12.3
  Solder Side w0.5: R3.1 110.05,65.95 112,64 J6.1
NetJ6_2: J6.2 R6.1 | length 12.1
  Solder Side w0.5: R6.1 110.5,53 112,54.5 J6.2
NetJ7_1: J7.1 R8.1 | length 22.9
  Solder Side w0.5: R8.1 104.5,49 106,50.5 J7.1
NetJ7_2: J7.2 R18.1 | length 11.3
  Solder Side w0.5: R18.1 J7.2
NetJU1_2: JU1.2 LCD1.19 | length 80
  Solder Side w0.5: JU1.2 50.4,75.4 56,81 56,127.94 LCD1.19
NetLCD1_7: LCD1.7 Pot4.2 | length 13.5
  Solder Side w0.5: LCD1.7 43,129.58 Pot4.2
NetLCD1_8: LCD1.8 U4.4 | length 29.6
  Solder Side w0.5: U4.4 35.615,117.115 44.5,126 44.5,130 37.62,136.88 LCD1.8
NetLCD1_9: LCD1.9 U4.5 | length 28.9
  Solder Side w0.5: U4.5 36.885,116.885 45.5,125.5 45.5,130.8 40.16,136.14 LCD1.9
NetLCD1_10: LCD1.10 U4.6 | length 28.1
  Solder Side w0.5: U4.6 38.155,116.655 46.5,125 46.5,131.25 42.7,135.05 LCD1.10
NetLCD1_15: LCD1.15 U4.9 | length 41.7
  Solder Side w0.5: U4.9 47.1,105.6 52,110.5 52,134.1 LCD1.15
NetLCD1_16: LCD1.16 U4.10 | length 47.8
  Solder Side w0.5: U4.10 39.425,104.075 40.5,103 45.7,103 53,110.3 53,132.56 LCD1.16
NetLCD1_17: LCD1.17 U4.11 | length 52.3
  Solder Side w0.5: U4.11 38.155,103.095 39.25,102 46,102 54,110 54,131.02 LCD1.17
NetLCD1_18: LCD1.18 U4.12 | length 56.7
  Solder Side w0.5: U4.12 36.885,102.365 38.25,101 46.4,101 55,109.6 55,129.48 LCD1.18
NetLCD1_20: LCD1.20 Q1.3 | length 26.5
  Component Side w0.5: v1(48.5,135) 67.25,135 68.1,135.85 LCD1.20
  Solder Side w0.5: Q1.3 48.5,130.35 v1(48.5,135) ; LCD1.20@68,137.4 LCD1.20
NetLED1_1: LED1.1 R2.2 | length 3.9
  Component Side w0.5: LED1.1 R2.2
NetLED2_1: LED2.1 R5.2 | length 2.3
  Component Side w0.5: LED2.1 R5.2
NetQ1_1: Q1.1 R10.2 U4.7 | length 24.5
  Solder Side w0.5: U4.7 39.425,116.425 41.5,118.5 43.5,120.5 ; R10.2 44.5,119.5 43.5,120.5 ; Q1.1 47.5,124.5 43.5,120.5
NetR5_1: R5.1 U3.28 | length 5.3
  Component Side w0.5: U3.28@92.86,71.3 U3.28 94.159,71.36 96.299,73.5 R5.1
NetR11_2: R11.2 R14.2 U4.15 | length 8.8
  Solder Side w0.5: R11.2 33.05,96.85 R14.2 33.05,105.575 U4.15
NetR12_2: R12.2 R13.2 U4.14 | length 9.7
  Solder Side w0.5: U4.14 34.345,102.905 36.45,100.8 R13.2 36.5,99.7 R12.2
NetR15_2: R15.2 R20.1 U4.3 | length 12.5
  Solder Side w0.5: R20.1 R15.2 27.7,118.3 28.5,117.5 33.25,117.5 34.345,116.405 U4.3
NetR16_2: R16.2 R21.1 U4.2 | length 11.1
  Solder Side w0.5: R21.1 R16.2 27.7,115.2 29.25,116.75 32.5,116.75 33.075,116.175 U4.2
NetR17_2: R17.2 R22.1 U4.1 | length 13.8
  Solder Side w0.5: R22.1 R17.2 27.7,108.8 28.5,108 30.75,108 31.755,109.005 U4.1
NetTP19_1: TP19.1 U2.2 | length 8.2
  Component Side w0.5: TP19.1 73.1,112.8 73.625,112.275 U2.2
NetTP20_1: TP20.1 U2.15 | length 9.6
  Component Side w0.5: U2.15 87.775,112.275 88.3,112.8 TP20.1
NetTP21_1: TP21.1 U2.3 | length 12.1
  Component Side w0.5: TP21.1 72.64,110.8 72.845,111.005 U2.3
NetTP22_1: TP22.1 U2.14 | length 13.5
  Component Side w0.5: U2.14 96.095,111.005 TP22.1
NetTP23_1: TP23.1 U2.4 | length 8.6
  Component Side w0.5: TP23.1@68.9,109.6 TP23.1@69.035,109.735 ; TP23.1 71.55,108.8 72.485,109.735 U2.4
NetTP24_1: TP24.1 U2.13 | length 9.8
  Component Side w0.5: U2.13 82.99,109.8 89.05,109.8 90.05,108.8 TP24.1
NetTP25_1: TP25.1 U2.5 | length 12.7
  Component Side w0.5: TP25.1 71.55,106.8 73.215,108.465 U2.5
NetTP26_1: TP26.1 U2.12 | length 14.1
  Component Side w0.5: U2.12 87.885,108.465 89.55,106.8 TP26.1
NetTP27_1: TP27.1 U2.6 | length 9
  Component Side w0.5: TP27.1 72.3,104.8 74.695,107.195 U2.6
NetTP28_1: TP28.1 U2.11 | length 10.4
  Component Side w0.5: U2.11 86.905,107.195 89.3,104.8 TP28.1
NetTP29_1: TP29.1 U2.7 | length 13.3
  Component Side w0.5: TP29.1 72.55,102.8 75.675,105.925 U2.7
NetTP30_1: TP30.1 U2.10 | length 15.1
  Component Side w0.5: U2.10 85.425,105.925 88.55,102.8 95.3,102.8 TP30.1@96.3,103.8
NetTP31_1: TP31.1 U3.16 | length 12.9
  Solder Side w0.5: U3.16 94.644,39.356 95.5,38.5 95.5,35 TP31.1
NetTP32_1: TP32.1 U3.15 | length 7.2
  Solder Side w0.5: U3.15 92.8,32.7 TP32.1
NetTP33_1: TP33.1 U3.23 | length 33.7
  Solder Side w0.5: TP33.1 86,56.5 88.16,58.66 U3.23
NP+: J8.1 TP15.1 U3.25 | length 160.8
  Solder Side w0.5: 83.74,63.74 83.75,63.75 ; U3.25 83.76,63.74 83.75,63.75 ; TP15.1 92.3,9 83.75,17.55 83.75,63.75 ; J8.1 108.2,114.7 108.2,101.7 114.7,95.2 114.7,88.7 113.8,87.8 84.581,87.8 81.65,84.869 81.65,65.85 83.75,63.75
POT_BPM: Pot1.2 TP3.1 U3.9 | length 42.9
  Component Side w0.5: U3.9 54.984,49.516 69,35.5 69,33 ; TP3.1 69,33 ; Pot1.2 69,33
POT_IE: Pot2.2 TP4.1 U3.10 | length 41.5
  Component Side w0.5: TP4.1 19,33 ; Pot2.2 19,33 ; U3.10 32.976,46.976 19,33
POT_VT: Pot3.2 TP5.1 U3.11 | length 103
  Component Side w0.5: U3.11 56.764,44.436 62,39.2 62,26.1 67.6,20.5 116,20.5 119,23.5 Pot3.2 TP5.1
PP+: J9.1 TP16.1 U3.26 | length 143.7
  Component Side w0.5: v1(82,62.5) v1(85.8,66.3)
  Solder Side w0.5: v1(82,62.5) 82,16 TP16.1 ; U3.26 92.78,66.3 v1(85.8,66.3) 82.3,69.8 82.3,84.6 84.826,87.126 93.649,87.126 93.675,87.1 114.5,87.1 115.7,88.3 115.7,102.8 J9.1 J9.1@112,107
SCL: LCD1.4 R12.1 TP12.1 U3.14 | length 112.6
  Component Side w0.5: LCD1.4@30,124.8 27.6,122.4 27.6,91.5 29.7,89.4 29.54,89.24 30,89.24 30,85.5 32.1,83.4 v1(35.8,83.4)
  Solder Side w0.5: R12.1 36.5,84.1 v1(35.8,83.4) 35.8,42.2 TP12.1 41.184,36.816 U3.14
SDA: LCD1.3 R11.1 TP11.1 U3.13 | length 137.4
  Component Side w0.5: LCD1.3@30,127.34 28.34,127.34 26.6,125.6 26.6,83.9 29,81.5 v1(33,81.5)
  Solder Side w0.5: LCD1.3@30,91.78 30.02,91.8 33,91.8 ; 32.96,89.24 33,89.2 ; R11.1 33,91.8 ; U3.13 46.144,39.356 47,38.5 47,34 46,33 37.8,33 34.6,36.2 34.6,79.9 v1(33,81.5) 33,89.2 ; 33,89.2 33,91.8
SETON: R8.2 R9.1 TP13.1 U3.21 | length 70.1
  Component Side w0.5: v1(100.2,36.4) 104,32.6 v1(104,23)
  Solder Side w0.5: U3.21 90.944,52.056 90,53 90,55.5 91,56.5 95.5,56.5 98.25,53.75 98.25,38.25 v1@100.05,36.45 ; TP13.1 101,17 104,20 v1(104,23) ; v1(100.2,36.4) 103.95,32.65 R8.2 R9.1
SETUP: U2.1 U3.27 | length 54.9
  Component Side w0.5: U2.1 78.955,113.545 80,112.5 80,76.92 88.1,68.82 U3.27
WAREA: R3.2 R4.1 TP9.1 U3.19 | length 58.5
  Component Side w0.5: U3.19 96.976,46.976 98,48 98,59 97,60 v1(95,60)
  Solder Side w0.5: U3.19 90.976,46.976 90.488,46.488 90.488,29.512 TP9.1 ; v1(95,60) 95,64.25 98.3,67.55 R4.1 R3.2
pads on no net: J3.2 J5.2 LCD1. LCD1.11 LCD1.12 LCD1.13 LCD1.14 Pot1. Pot2. Pot3. U1.1 U1.5 U1.6 U1.7 U1.8 U3. U3.1 U3.2 U3.3 U3.4 U3.8 U3.30 U3.31 U3.32 U4.13

## Polygon pours and split planes (outlines as drawn)
GND on GND "Solder Side-No Net" (solid, pour order 14): 73,128 73,100 102.5,100 102.5,35 118,35 118,40 138,40 138,0 0,0 0,40 20,40 20,140 73,140
GND24V on GND "Solder Side-No Net" (solid, pour order 12): 73,100 102.5,100 102.5,35 118,35 118,140 73,140 73,128
5V on Alimentation "Solder Side-No Net" (solid, pour order 22): 73,128 73,100.1 102.5,100.1 102.5,35 118,35 118,40 138,40 138,0 0,0 0,40 20,40 20,140 73,140
24V on Alimentation "Solder Side-No Net" (solid, pour order 20): 73,100 102.5,100 102.5,35 118,35 118,140 73,140 73,128

## Silkscreen, mask and mechanical layers (free items; w line width, h text height)
Top Overlay:
  text "Input -> Output" at 70.3,117.6 h1.52
  text "Buzzer" at 62.5,70.5 h1.52
  text "Inhale / Exhale" at 96.25,64.25 h1.52
  text "Power / ON" at 33.2,53.1 h1.52
  text "Pressure / Sensor" at 22.5,29.5 h1.52
  text "GEVE-Ventilator / Rev 2  / HEPIA / HUG / ANGARA Tech. / 2020 / Bryan Musy / Hepia-EL20-169" at 33.3,5.4 h1.52
  text "IE" at 18,2 h1.52
  text "BPM" at 67,2 h1.52
  text "VT" at 118,2 h1.52
Bottom Overlay:
  text "CN5.1" at 105.25,129.75 h1.52
  text "24V" at 92,127 h1.52 r90
  text "GND24V" at 96,127 h1.52 r90
  text "CN5.2" at 105.25,124.75 h1.52
  text "CN5.3" at 105.25,117.75 h1.52
  text "CN5.4" at 105.25,112.75 h1.52
  text "A0-A1-A2" at 21,108.5 h1.52 r270
  text "CN5.5" at 105.25,105.75 h1.52
  text "CN5.6" at 105.25,100.75 h1.52
  text "CN5.7" at 105.25,93.75 h1.52
  text "CN5.9" at 105.25,73.75 h1.52
  text "GND" at 40.25,71.75 h1.52
  text "Btn / Reset" at 40.5,65.5 h1.52
  text "CN5.13" at 105.25,61.75 h1.52
  text "GND" at 40.25,59.75 h1.52
  text "CN5.14" at 105.25,56.75 h1.52
  text "Btn / ON-OFF" at 40.5,53.5 h1.52
  text "CN5.15" at 105.25,49.75 h1.52
  text "CN5.16" at 105.25,44.75 h1.52
  text "To the driver  / LECPAP" at 117.3,36.7 h1.52
Mechanical 5:
  lines w0.254: 20,140 20,140
Mechanical 16:
  lines w0.254: 0,0 0,40 20,40 20,140 118,140 118,40 138,40 138,0 0,0